# Altium PCB PCB1.PcbDoc
Units mm, origin at the board's own origin, x right, y up, seen from the top; angles counter-clockwise.
Board outline 119.87 x 99.87 mm, 2 copper layers (Top Layer, Bottom Layer); 17 components, 22 nets, 129 pads, 5 vias.
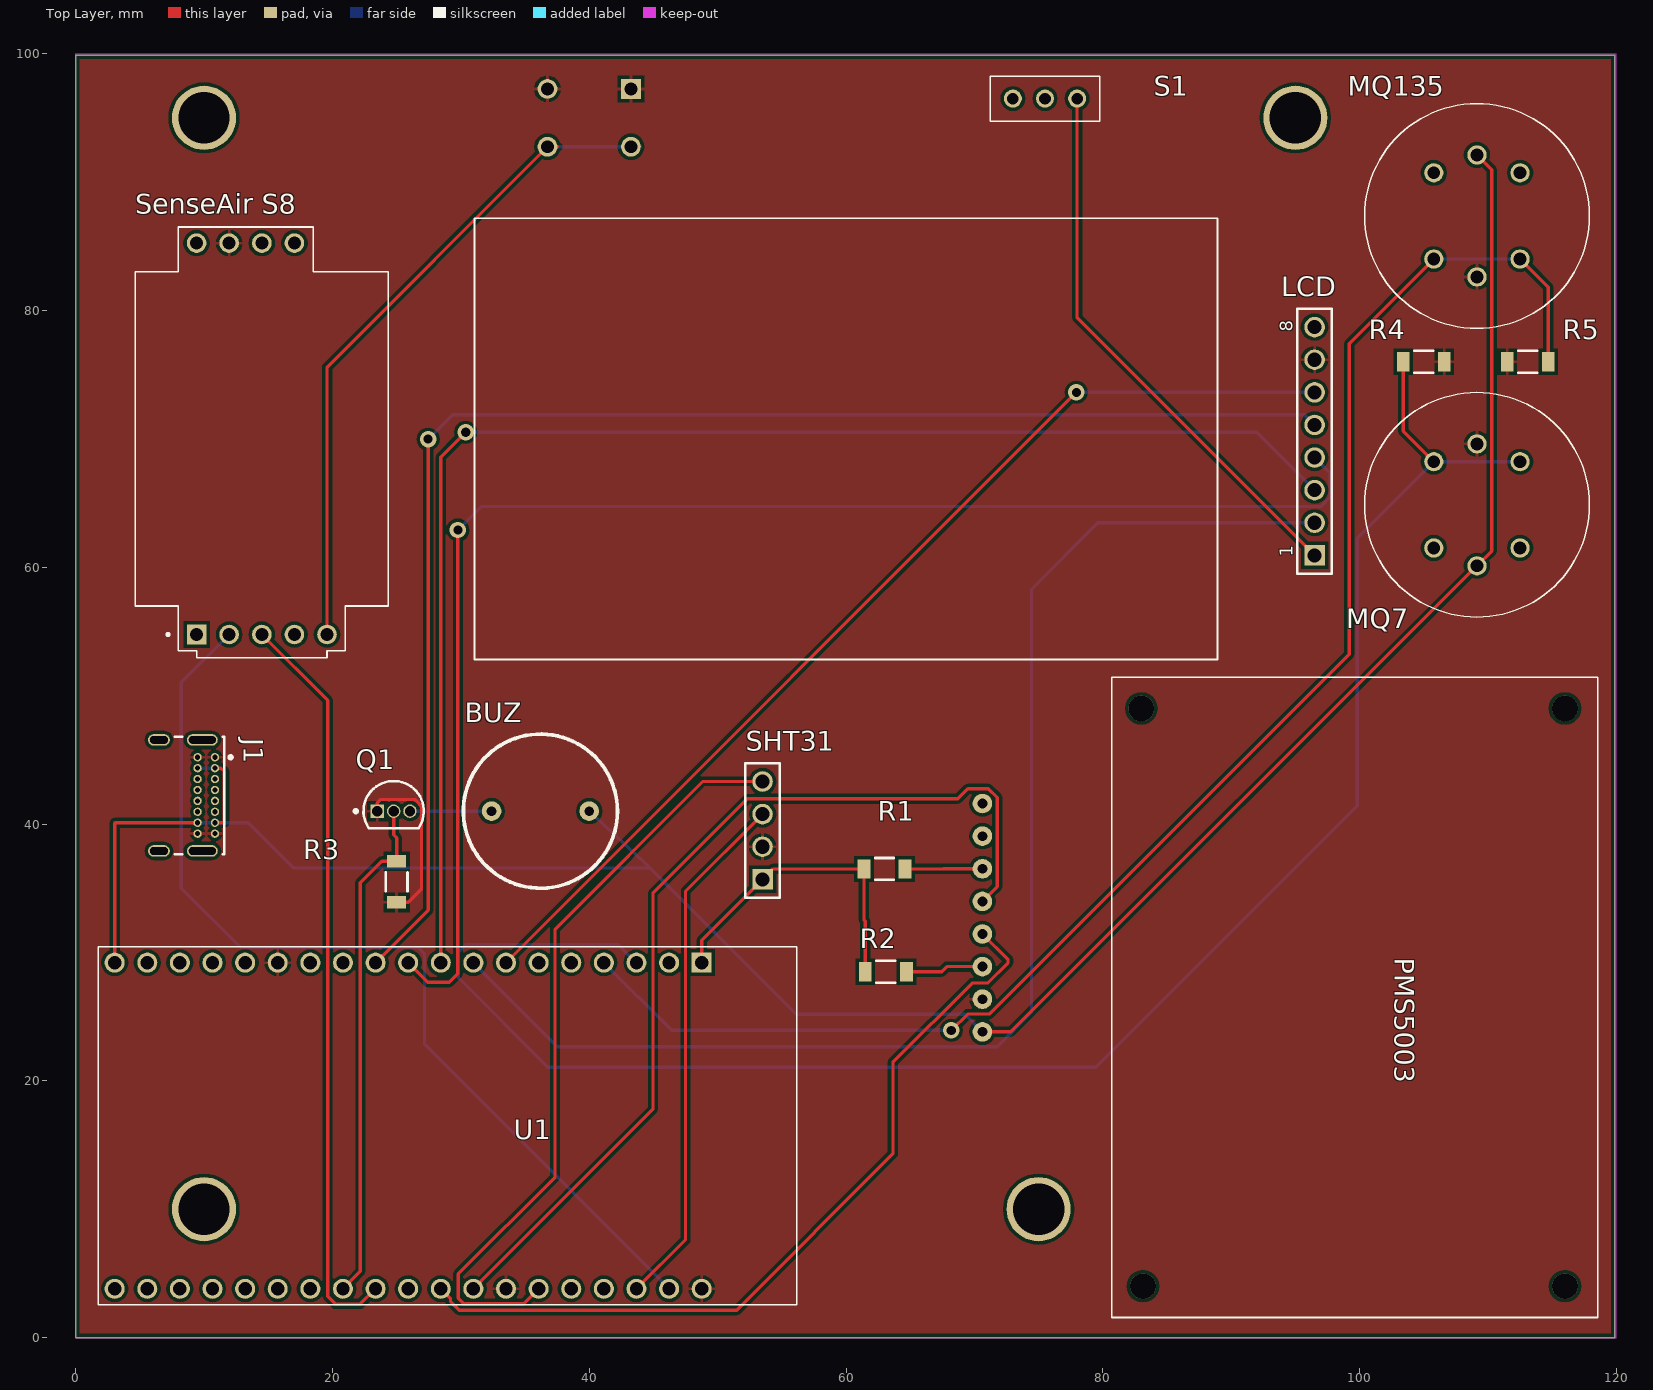
[diagram p0: Top Layer view]
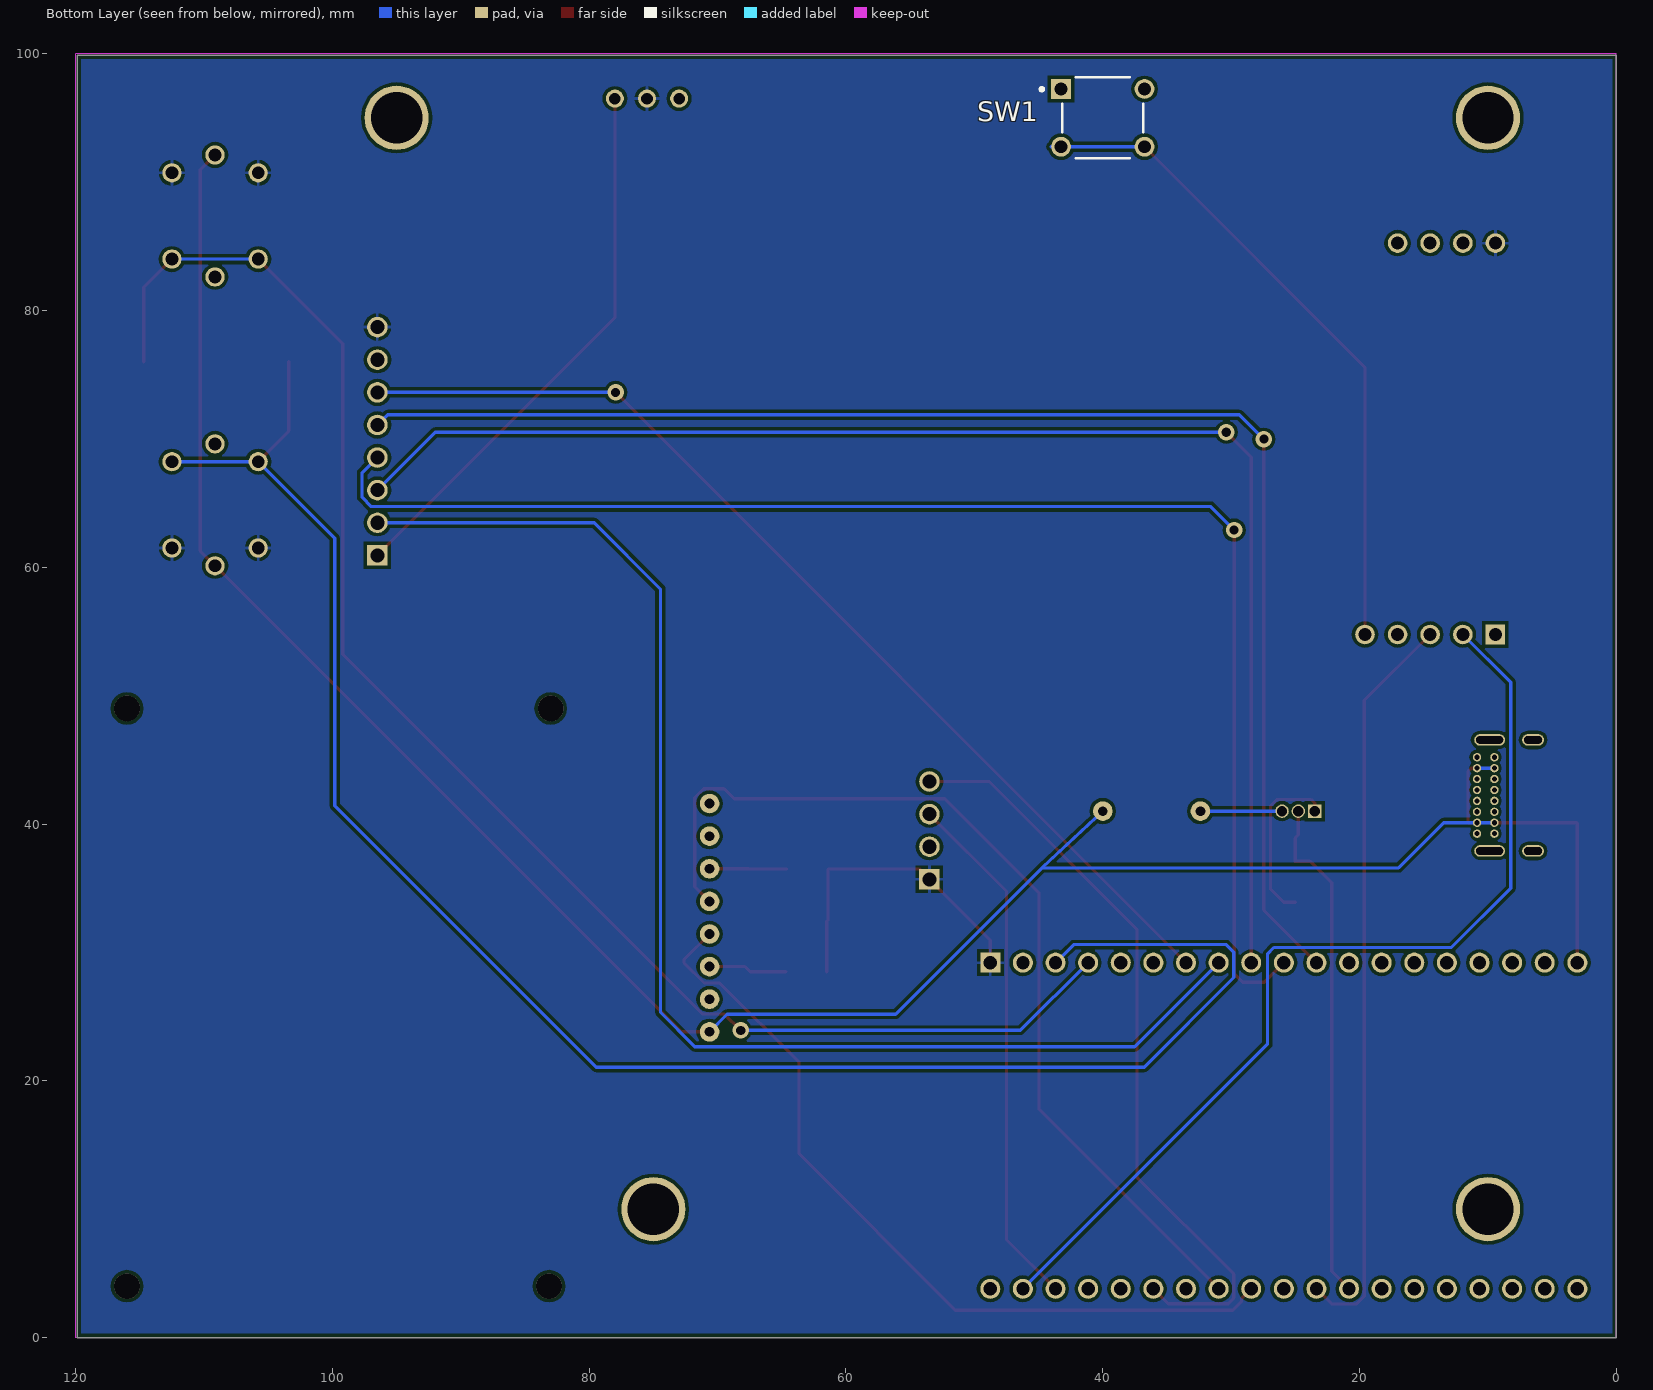
[diagram p1: Bottom Layer view, seen from below]
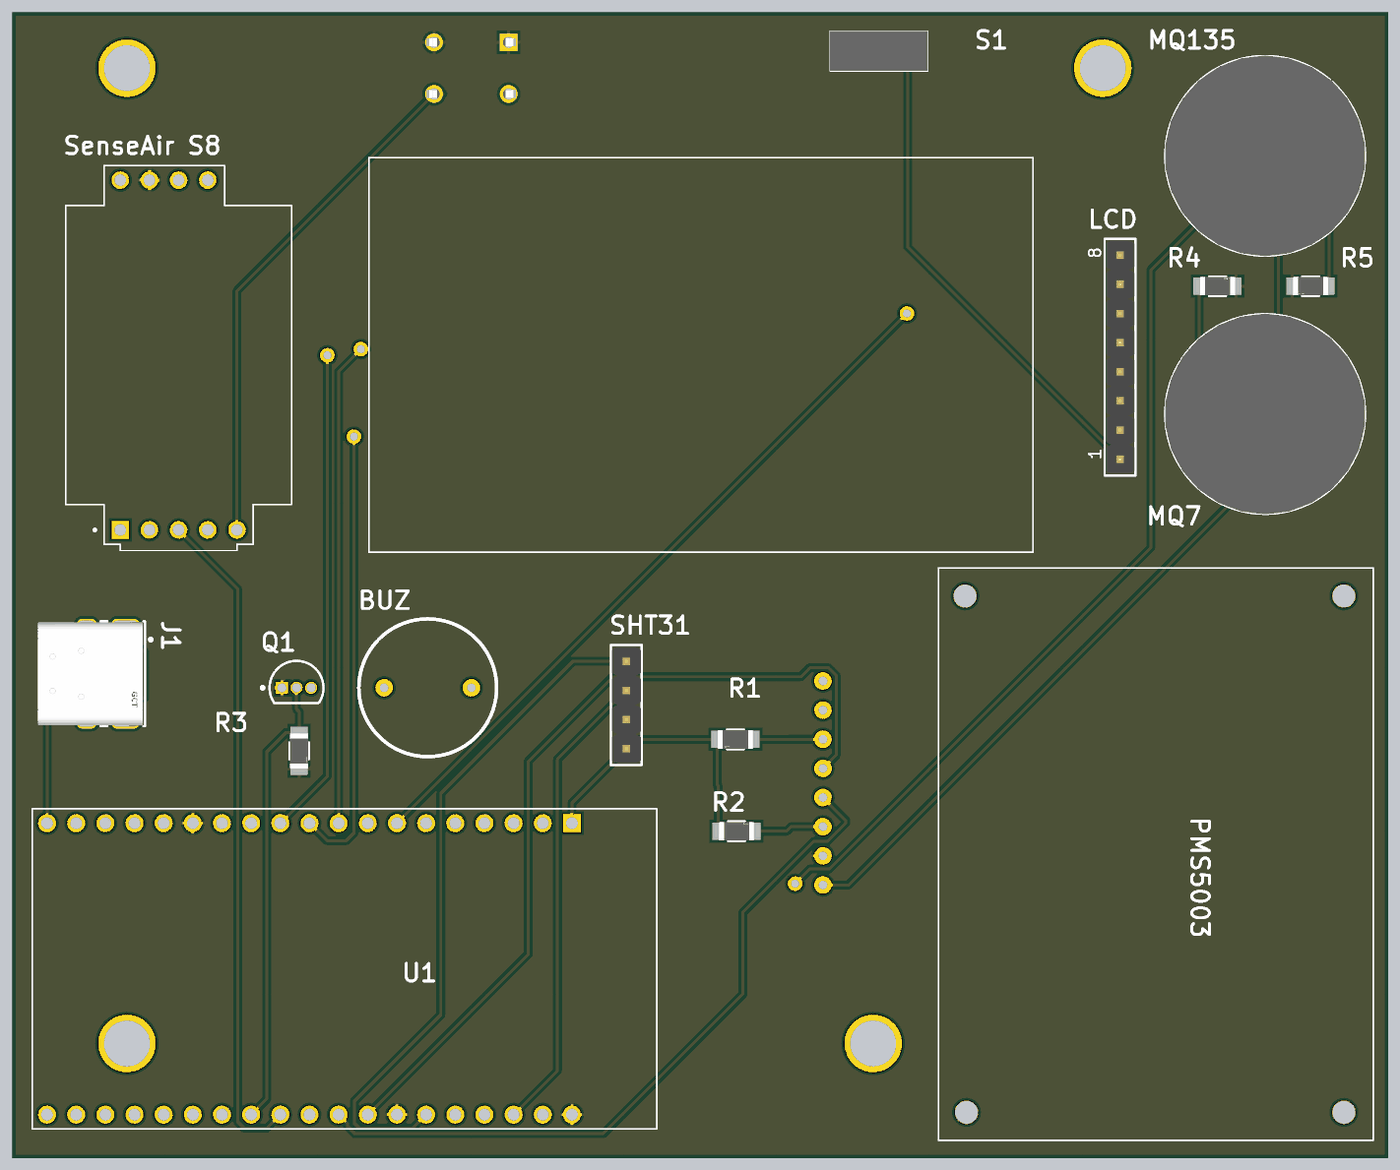
[diagram p2: 3D render of the assembled board from above, using the file's embedded part models]

## Layer stack, top to bottom
Top Solder: solder mask 0.0102, Solder Resist, Dk 3.5
Top Layer: signal copper 0.0356
Dielectric 1: dielectric 0.32, FR-4, Dk 4.8
Bottom Layer: signal copper 0.0356
Bottom Solder: solder mask 0.0102, Solder Resist, Dk 3.5

## Board outline
0,0 0,99.873 119.873,99.873 119.873,0

## Design rules (kind name [scope] priority, off if disabled: settings)
Clearance [All] p1: gap=0.254 ignorepadtopadclearanceinfootprint=FALSE except(0: Arc-Hole Track-Hole SMDPad-Hole THPad-Hole Via-Hole Fill-Hole Poly-Hole Region-Hole Text-Hole)
PolygonConnect [All] p1: connectstyle=Relief reliefconductorwidth=0.254 reliefentries=4 polygonreliefangle="90 Angle" airgapwidth=0.254
RoomDefinition Sheet1 [InComponentClass('Sheet1')] p1: confinementstyle=ConfineOut formatcopy=TRUE lockcomponents=FALSE outline 179.532,8.653 283.037,8.653 283.037,66.438 179.532,66.438
RoutingVias [All] p1: holewidth=0.711 width=1.27 viastyle="Through Hole" minholewidth=0.711 minwidth=1.27 maxholewidth=0.711 maxwidth=1.27
SolderMaskExpansion [All] p1: expansion=0.102 istentingtop=FALSE
Width [All] p1: maxlimit=0.254 minlimit=0.254 preferedwidth=0.254
30 further rules are at their usual default settings.

## Components (designator, comment, footprint, x,y, rotation, side; value= is the part's Value field where it differs from the comment)
BUZ "buzzer" buzzer 36.2,41 r180 top
J1 "USB4085-GF-A" FP-USB4085-GF-A-MFG 6.825,42.225 r270 top
LCD "61300811121" 61300811121 96.5,69.81 r90 top
MQ7 "POLOLU-1482" POLOLU1482 105.782,61.5 r90 top
MQ135 "POLOLU-1482" POLOLU1482 112.5,90.718 r270 top
PMS5003 "pms5003" pms5003 83.127,4 r90 top (schematic designator pms5003)
Q1 "2N7000" ONSC-TO-92-3-29-11 24.77,41 r0 top
R1 "10k" FP-RC1206-MFG 63,36.5 r180 top value=0Ω
R2 "10k" FP-RC1206-MFG 63.1,28.5 r0 top value=0Ω
R3 "1M" FP-RC1206-MFG 25,35.5 r270 top value=0Ω
R4 "2k" FP-RC1206-MFG 105,76 r0 top value=0Ω
R5 "2k" FP-RC1206-MFG 113.1,76 r180 top value=0Ω
S1 "SS12D00G3" SS12D00G3 75.5,96.5 r0 top
"SenseAir S8" "006-0-0002" XDCR_006-0-0002 14.5,70 r90 top
SHT31 "61300411121" 61300411121 53.5,39.5 r90 top
SW1 "3-1825910-1" FP-3-1825910-1-MFG 40,95 r180 bottom
U1 "ESP32-DEVKITC-32D" MODULE_ESP32-DEVKITC-32D 29,16.5 r270 top

## Footprints (in the part's own frame and the unit in brackets; to place one, negate y for a bottom-side part, rotate by r counter-clockwise, add the part's x,y. Pads: shape width x height; smd on the part's side, far side on the other; paste and mask are expansions set on the pad)
61300411121 [mm] "Pin Header, pitch 2.54 mm, THT, Vertical, single row, 4p"
  rect 1.6x1.6 hole 1.1: 1(-3.81,0)
  round 1.6 hole 1.1: 2(-1.27,0) 3(1.27,0) 4(3.81,0)
  silkscreen extent -5.23,-1.35 5.23,1.34, body extent -5.08,-1.27 5.08,1.27, height 8.57
61300811121 [mm] "Pin Header, pitch 2.54 mm, THT, Vertical, single row, 8p"
  rect 1.6x1.6 hole 1.1: 1(-8.89,0)
  round 1.6 hole 1.1: 2(-6.35,0) 3(-3.81,0) 4(-1.27,0) 5(1.27,0) 6(3.81,0) 7(6.35,0) 8(8.89,0)
  silkscreen extent -10.31,-1.34 10.31,1.35, body extent -10.16,-1.27 10.16,1.27, height 8.57
buzzer [mil]
  round 60 hole 30: 1(-149.61,0) 2(149.61,0)
  silkscreen extent -236,-236 236,236
FP-3-1825910-1-MFG [mm]
  rect 1.54x1.54 hole 0.99 paste-1000 mask+0: 1(-3.25,2.25)
  round 1.54 hole 0.99 paste-1000 mask+0: 2(3.25,2.25) 3(-3.25,-2.25) 4(3.25,-2.25)
  silkscreen extent -4.87,-3.14 3.15,3.15, body extent -3.9,-2.99 3.9,3, height 17.3
FP-RC1206-MFG [mm]
  rect 1x1.5 smd paste+0 mask+0: 1(-1.6,0) 2(1.6,0)
  silkscreen extent -0.73,-0.85 0.73,0.85, body extent -2.2,-0.95 2.2,0.95, height 0.25
FP-USB4085-GF-A-MFG [mm]
  rrect100% 0.9x2.4 hole 2.1 slot 0.6 at 0 deg paste-1000 mask+0: 1(-4.325,3.045) 2(4.325,3.045)
  rrect100% 0.9x1.7 hole 1.4 slot 0.6 at 0 deg paste-1000 mask+0: 3(-4.325,-0.335) 4(4.325,-0.335)
  round 0.65 hole 0.4 paste-1000 mask+0: A1(-2.975,4.025) A4(-2.125,4.025) A5(-1.275,4.025) A6(-0.425,4.025) A7(0.425,4.025) A8(1.275,4.025) A9(2.125,4.025) A12(2.975,4.025) B1(2.975,2.675) B4(2.125,2.675) B5(1.275,2.675) B6(0.425,2.675) B7(-0.425,2.675) B8(-1.275,2.675) B9(-2.125,2.675) B12(-2.975,2.675)
  silkscreen extent -4.57,0.89 4.58,5.37, body extent -4.87,-4.83 4.87,4.83, height 0.25
MODULE_ESP32-DEVKITC-32D [mm]
  rect 1.56x1.56 hole 1.04: 1(-12.7,19.76)
  round 1.56 hole 1.04: 2(-12.7,17.22) 3(-12.7,14.68) 4(-12.7,12.14) 5(-12.7,9.6) 6(-12.7,7.06) 7(-12.7,4.52) 8(-12.7,1.98) 9(-12.7,-0.56) 10(-12.7,-3.1) 11(-12.7,-5.64) 12(-12.7,-8.18) 13(-12.7,-10.72) 14(-12.7,-13.26) 15(-12.7,-15.8) 16(-12.7,-18.34) 17(-12.7,-20.88) 18(-12.7,-23.42) 19(-12.7,-25.96) 20(12.7,19.76) 21(12.7,17.22) 22(12.7,14.68) 23(12.7,12.14) 24(12.7,9.6) 25(12.7,7.06) 26(12.7,4.52) 27(12.7,1.98) 28(12.7,-0.56) 29(12.7,-3.1) 30(12.7,-5.64) 31(12.7,-8.18) 32(12.7,-10.72) 33(12.7,-13.26) 34(12.7,-15.8) 35(12.7,-18.34) 36(12.7,-20.88) 37(12.7,-23.42) 38(12.7,-25.96)
  silkscreen extent -13.95,-27.25 13.95,27.15
ONSC-TO-92-3-29-11 [mm] "TO, 3-Leads, Body Dia 4.7mm, Pitch 1.27mm"
  rect 1.05x1.05 hole 0.8: 1(-1.27,0)
  round 1.05 hole 0.8: 2(0,0) 3(1.27,0)
  silkscreen extent -3.07,-1.34 2.35,2.35, body extent -2.35,-1.33 2.36,2.36, height 7.87
pms5003 [mil]
  round 60 hole 30: 1(780.08,492.13) 2(880.08,492.13) 3(980.08,492.13) 4(1080.08,492.13) 5(1180.08,492.13) 6(1280.08,492.13) 7(1380.08,492.13) 8(1480.08,492.13)
  round 78.74 hole 78.74: ""(0,0) ""(0,-1294.21) ""(1771.65,-1294.21) ""(1771.65,5)
  silkscreen extent -96,-1395 1868,96
POLOLU1482 [mm]
  round 1.5 hole 1: A1(0,0) A2(0,-6.718) B1(6.718,0) B2(6.718,-6.718) H1(-1.391,-3.359) H2(8.109,-3.359)
  silkscreen extent -5.39,-12.11 12.11,5.39, body extent -5.39,-12.11 12.11,5.39, height 14.6
SS12D00G3 [mm]
  round 1.4 hole 0.9: 1(-2.5,0) 2(0,0) 3(2.5,0)
  silkscreen extent -4.25,-1.75 4.25,1.75, body extent -4.25,-1.75 4.25,1.75, height 7.1
XDCR_006-0-0002 [mil]
  rect 60x60 hole 40: 1(-600,200)
  round 60 hole 40: 2(-600,100) 3(-600,0) 4(-600,-100) 5(-600,-200) 6(600,-100) 7(600,0) 8(600,100) 9(600,200)
  silkscreen extent -671,-388 650,388

## Part data
J1: library part CMP-196119-000001-2, "CONN RCPT USB2.0 TYPE C 24POS RA", Contact Material="Copper Alloy", Contact Plating=Gold, Gender=Receptacle, Number of Positions=16, Orientation="Right Angle", USB Standard="USB 2.0"
LCD: library part CMP-1502-01076-1, "THT Vertical Pin Header WR-PHD, Pitch 2.54 mm, Single Row, 8 pins", Contact Resistance=20mOhm, Manufacturer="Wurth Elektronik", Operating Temperature=-40to105degC, Rated Current=3A, Withstanding Voltage=500VAC, Working Voltage=250VAC, Datasheet URL=https://katalog.we-online.de/em/datasheet/6130xx11121.pdf, Gender=Male, Manufacturer URL=http://www.we-online.de, Mounting Technology=THT, Orientation=Vertical, Package Reference=61300811121, Packaging=Bag, Part Number=61300811121, Pin Number=8, Pitch=2.54mm, Publisher=WurthElektronik, Row Number=Single
MQ7 MQ135: "Integrated Circuit", Manufacturer_Name=Pololu, Datasheet Link=https://www.pololu.com/file/0J313/MQ7.pdf, Height=14.5mm, Manufacturer_Part_Number=POLOLU-1482
Q1: library part CMP-1058-00936-1, "Small Signal MOSFET, 200 mA, 60 V, N-Channel, 3-Pin TO-92, Bulk Box", Manufacturer="On Semiconductor", Package Type=TO-92, Channel Polarity="N Channel", Ciss Typ (pF)=60, ComponentLink1Description="Manufacturer URL", ComponentLink1URL=http://www.onsemi.com/, ComponentLink2Description=Datasheet, ComponentLink2URL=http://www.onsemi.com/pub_link/Collateral/2N7000-D.PDF, ComponentLink3Description="Package Specification", ComponentLink3URL=http://www.onsemi.cn/pub_link/Collateral/2N6426-D.PDF, Configuration=Single, Coss Typ (pF)=25, Crss Typ (pF)=5, DatasheetVersion="Rev. 8", ID Max (A)=0.2, Mounting Technology="Through Hole", PackageDescription="3-Pin Transistor Outline, Body 4.825 x 3.685 mm, Pitch 1.27 mm", PackageReference=TO-92-3-29-11_AM_SL, PackageVersion="Rev. AM", Packing="Bulk Box", PartNumber=2N7000, PD Max (W)=0.35, V(BR)DSS Min (V)=60, VGS Max (V)=20, VGS(th) Max (V)=3
R1 R2 R3 R4 R5: library part CMP-2100-03681-2, "RES SMD 0 OHM JUMPER 1/4W 1206", Manufacturer=YAGEO, Manufacturer Part Number=RC1206JR-070RL, Package=RC1206, Power Rating=0.25W, Resistance=0Ω, Temperature="-55°C to +155°C", Temperature Coefficient=300ppm/°C, Temperature Range High=+155°C, Temperature Range Low=-55°C, Tolerance=5%, Voltage Rating=200V, Automotive=No, Category=Res, ComponentLink2Description=Datasheet, ComponentLink2URL=https://www.yageo.com/upload/media/product/productsearch/datasheet/rchip/PYu-RC_Group_51_RoHS_L_10.pdf, Composition="Thick Film", Device Class L1="Passive Components", Device Class L2=Resistors, Device Class L3="Chip SMD Resistors", Digikey Description="RES SMD 0 OHM JUMPER 1/4W 1206", Footprint Url=https://www.yageo.com/upload/website/yageo_PYu-R_Mount_10_19050818_343.pdf, Height=0.65mm, Ipc Land Pattern Name=RESC310160X55, Lead Free=Yes, Mouser Description="Resistor: thick film; SMD; 1206; 0O; 0.25W; ±5%; -55÷155°C", Octopart=https://octopart.com/rc1206jr-070rl-yageo-40025601, RoHS=TRUE, Series=RC
S1: "Switch", Manufacturer_Name=Vimex, Datasheet Link=http://vimex.com/switches/techdocs/SS12D00-tech.pdf, Height=7mm, Manufacturer_Part_Number=SS12D00G3
"SenseAir S8": "Carbon Dioxide (CO2) Sensor", Package=None, Availability=Warning, DigiKey-Purchase-URL=https://snapeda.com/shop?store=DigiKey&id=4817567, MF="Senseair North America Inc.", MP=006-0-0002, Price=None, SnapEDA_Link=https://www.snapeda.com/parts/006-0-0002/Senseair%20North%20America%20Inc./view-part/4817567/?ref=snap
SHT31: library part CMP-1502-01064-1, "THT Vertical Pin Header WR-PHD, Pitch 2.54 mm, Single Row, 4 pins", Contact Resistance=20mOhm, Manufacturer="Wurth Elektronik", Operating Temperature=-40to105degC, Rated Current=3A, Withstanding Voltage=500VAC, Working Voltage=250VAC, Datasheet URL=https://katalog.we-online.de/em/datasheet/6130xx11121.pdf, Gender=Male, Manufacturer URL=http://www.we-online.de, Mounting Technology=THT, Orientation=Vertical, Package Reference=61300411121, Packaging=Bag, Part Number=61300411121, Pin Number=4, Pitch=2.54mm, Publisher=WurthElektronik, Row Number=Single
SW1: library part CMP-03407-000001-1, "SWITCH TACTILE SPST-NO 0.05A 24V", Contact Current Rating=50mA, Contact Resistance=100mΩ, Manufacturer="TE Connectivity", Operating Force=160gf, Package=0, Temperature="-35°C to +85°C", Temperature Range High=+85°C, Temperature Range Low=-35°C, Automotive=No, Category=Switch, ComponentLink2Description=Datasheet, ComponentLink2URL=https://www.te.com/commerce/DocumentDelivery/DDEController?Action=srchrtrv&DocNm=1825910&DocType=Customer+Drawing&DocLang=English, Device Class L1=Electromechanical, Device Class L2=Switches, Device Class L3="Tactile Switches", Digikey Description="SWITCH TACTILE SPST-NO 0.05A 24V", Electromechanical Life=100000Cycles, Height=17.3mm, Lead Free=Yes, Manufacturer Part Number=3-1825910-1, Mount="Through Hole", Octopart=https://octopart.com/3-1825910-1-te+connectivity-46506874, RoHS=TRUE, Throw Configuration=SPST-NO
U1: "Eval Board For Esp-Wroom-32", Package=None, Availability=Unavailable, MP=ESP32-DEVKITC-32D, Price=None

## Free pads (board coordinates)
  round 5 hole 4: 20(10,10) 20(10,95) 20(75,10) 20(95,95)

## Via types
v1: diameter 1.27, hole 0.711, Top Layer to Bottom Layer, 5 vias

## Nets (pads, with @x,y where several pads share a name; then routed paths per layer and width w, separated by ;. In a path a pad name is that pad's centre, name@x,y a point inside that pad or via, vN(x,y) a via of type N, cw(c..) or ccw(c..) an arc to the next point about the centre after c; other vN are vias at no path point)
3V3: "SenseAir S8.9" LCD.8 MQ7.A1 MQ7.A2 MQ135.A1 MQ135.A2 R1.2 R2.1 S1.2 SHT31.1 U1.1 | length 24.7
  Top Layer w0.254: U1.1 48.76,30.95 SHT31.1 54.31,36.5 R1.2 61.4,32.537 61.5,32.437 R2.1
+5: BUZ.1 J1.A4 J1.A9 J1.B4 J1.B9 MQ7.H1 MQ135.H1 PMS5003.1 U1.19 | length 185.1
  Top Layer w0.254: U1.19 3.04,40.083 3.057,40.1 J1.B4 ; J1.A9 11.559,40.1 11.559,44.096 11.305,44.35 J1.A4 ; PMS5003.1 72.846,23.814 MQ7.H1 110.288,61.256 110.288,90.962 MQ135.H1
  Bottom Layer w0.254: J1.B4 J1.A9 13.438,40.1 16.961,36.578 44.731,36.578 ; J1.B9 J1.A4 ; BUZ.1 44.731,36.578 ; PMS5003.1 69.268,25.173 56.136,25.173 44.731,36.578
GND: "SenseAir S8.8" J1.A1 J1.A12 J1.B1 J1.B12 LCD.7 MQ7.H2 MQ135.H2 PMS5003.2 Q1.1 R3.2 R4.2 R5.2 SHT31.2 SW1.1 SW1.2 U1.14 U1.20 U1.26 | length 13.2
  Top Layer w0.254: Q1.1 23.5,41.636 23.776,41.912 26.418,41.912 26.946,41.383 26.946,34.947 25.899,33.9 R3.2
NetBUZ_2: BUZ.2 Q1.3 | length 6.4
  Bottom Layer w0.254: Q1.3 BUZ.2
NetLCD_1: LCD.1 S1.3 | length 43.2
  Top Layer w0.254: S1.3 78,79.42 LCD.1
NetLCD_2: LCD.2 U1.8 | length 104.4
  Bottom Layer w0.254: U1.8 37.522,22.658 71.782,22.658 74.449,25.325 74.449,58.295 79.614,63.46 LCD.2
NetLCD_3: LCD.3 U1.9 | length 110.1
  Top Layer w0.254: U1.9 28.44,68.572 v1(30.38,70.512)
  Bottom Layer w0.254: v1(30.38,70.512) 91.988,70.512 LCD.3
NetLCD_4: LCD.4 U1.10 | length 111.9
  Top Layer w0.254: U1.10 27.424,27.676 29.099,27.676 29.77,28.348 v1(29.77,62.892)
  Bottom Layer w0.254: v1(29.77,62.892) 31.599,64.721 96.979,64.721 97.69,65.432 97.69,67.35 LCD.4
NetLCD_5: LCD.5 U1.11 | length 112.6
  Top Layer w0.254: U1.11 27.454,33.294 v1(27.454,69.974)
  Bottom Layer w0.254: v1(27.454,69.974) 29.364,71.884 95.696,71.884 LCD.5
NetLCD_6: LCD.6 U1.7 | length 81.4
  Top Layer w0.254: U1.7 v1(77.94,73.62)
  Bottom Layer w0.254: v1(77.94,73.62) LCD.6
NetMQ7_B1: MQ7.B1 MQ7.B2 R4.1 U1.3 | length 142.8
  Top Layer w0.254: R4.1 103.4,70.6 MQ7.B1
  Bottom Layer w0.254: U1.3 42.271,30.609 30.38,30.609 29.796,30.024 29.796,28.043 36.781,21.058 79.453,21.058 99.824,41.429 99.824,62.26 MQ7.B1 MQ7.B2
NetMQ135_B1: MQ135.B1 MQ135.B2 R5.1 U1.4 | length 121.5
  Top Layer w0.254: v1(68.201,23.928) 69.471,25.198 71.172,25.198 99.189,53.215 99.189,77.407 MQ135.B2 ; MQ135.B1 114.7,81.8 R5.1
  Bottom Layer w0.254: U1.4 46.412,23.928 v1(68.201,23.928) ; MQ135.B2 MQ135.B1
Netpms5003_3: PMS5003.3 R2.2 | length 6.1
  Top Layer w0.254: R2.2 67.464,28.5 67.858,28.894 PMS5003.3
Netpms5003_4: PMS5003.4 U1.28 | length 63.5
  Top Layer w0.254: U1.28 29.202,3.038 29.202,2.801 29.872,2.131 51.483,2.131 63.654,14.302 63.654,21.439 69.826,27.611 71.02,27.611 72.62,29.211 72.62,29.441 PMS5003.4
Netpms5003_5: PMS5003.5 U1.27 | length 75.6
  Top Layer w0.254: U1.27 44.96,17.78 44.96,34.596 52.326,41.962 68.709,41.962 69.496,42.75 71.096,42.75 71.782,42.064 71.782,35.129 PMS5003.5
Netpms5003_6: PMS5003.6 R1.1 | length 6
  Top Layer w0.254: R1.1 67.591,36.5 67.605,36.514 PMS5003.6
NetQ1_2: Q1.2 R3.1 U1.31 | length 39.7
  Top Layer w0.254: U1.31 22.176,5.156 22.176,35.424 23.852,37.1 R3.1 25,38.914 24.77,39.144 Q1.2
"NetSenseAir S8_2": "SenseAir S8.2" U1.21 | length 76.3
  Bottom Layer w0.254: 11.96,54.76 8.231,51.031 8.231,35.003 12.854,30.38 26.672,30.38 27.18,29.872 27.18,22.84 U1.21
"NetSenseAir S8_3": "SenseAir S8.3" U1.30 | length 58.1
  Top Layer w0.254: 14.5,54.76 19.636,49.624 19.636,3.202 20.22,2.618 22.178,2.618 U1.30
"NetSenseAir S8_5": "SenseAir S8.5" SW1.3 SW1.4 | length 52.4
  Top Layer w0.254: 19.58,54.76 19.58,75.58 SW1.4@36.363,92.362 ; SW1.4@37.138,92.362 37.525,92.75
  Bottom Layer w0.254: 37.525,92.75 44.025,92.75 SW1.3
NetSHT31_3: SHT31.3 U1.22 | length 41
  Top Layer w0.254: U1.22 47.5,7.62 47.5,34.77 SHT31.3
NetSHT31_4: SHT31.4 U1.25 | length 59.7
  Top Layer w0.254: U1.25 34.899,2.639 30.232,2.639 29.796,3.075 29.796,4.955 37.34,12.498 37.34,31.802 48.847,43.31 SHT31.4
pads on no net: "SenseAir S8.1" "SenseAir S8.4" "SenseAir S8.6" "SenseAir S8.7" J1.1 J1.2 J1.3 J1.4 J1.A5 J1.A6 J1.A7 J1.A8 J1.B5 J1.B6 J1.B7 J1.B8 PMS5003. PMS5003.7 PMS5003.8 S1.1 U1.2 U1.5 U1.6 U1.12 U1.13 U1.15 U1.16 U1.17 U1.18 U1.23 U1.24 U1.29 U1.32 U1.33 U1.34 U1.35 U1.36 U1.37 U1.38

## Polygon pours and split planes (outlines as drawn)
3V3 on Bottom Layer "3V3_L02_P002" (solid, pour order 2): 0,0 0,99.873 119.873,99.873 119.873,0
GND on Top Layer "GND_L01_P000" (solid, pour order 0): 0,0 0,99.873 119.873,99.873 119.873,0

## Keep-outs
Keep-Out Layer:
  lines w0: 0,0 120,0 120,100 0,100 0,0

## Silkscreen, mask and mechanical layers (free items; w line width, h text height)
Top Overlay:
  lines w0.127: 31.063,52.814 88.936,52.814 88.936,87.187 31.063,87.187 31.063,52.814
Mechanical 1:
  lines w0.254: -0.1,-0.1 -0.1,101.5 152.3,101.5 152.3,-0.1 -0.1,-0.1

## Text inside footprints (layer, text, board x,y; h text height)
LCD: Top Overlay "8" at 94.8,78.32 h1.02 r90; Top Overlay "1" at 94.8,60.8 h1.02 r90